# EAGLE board breakout1 (EAGLE 4.15)
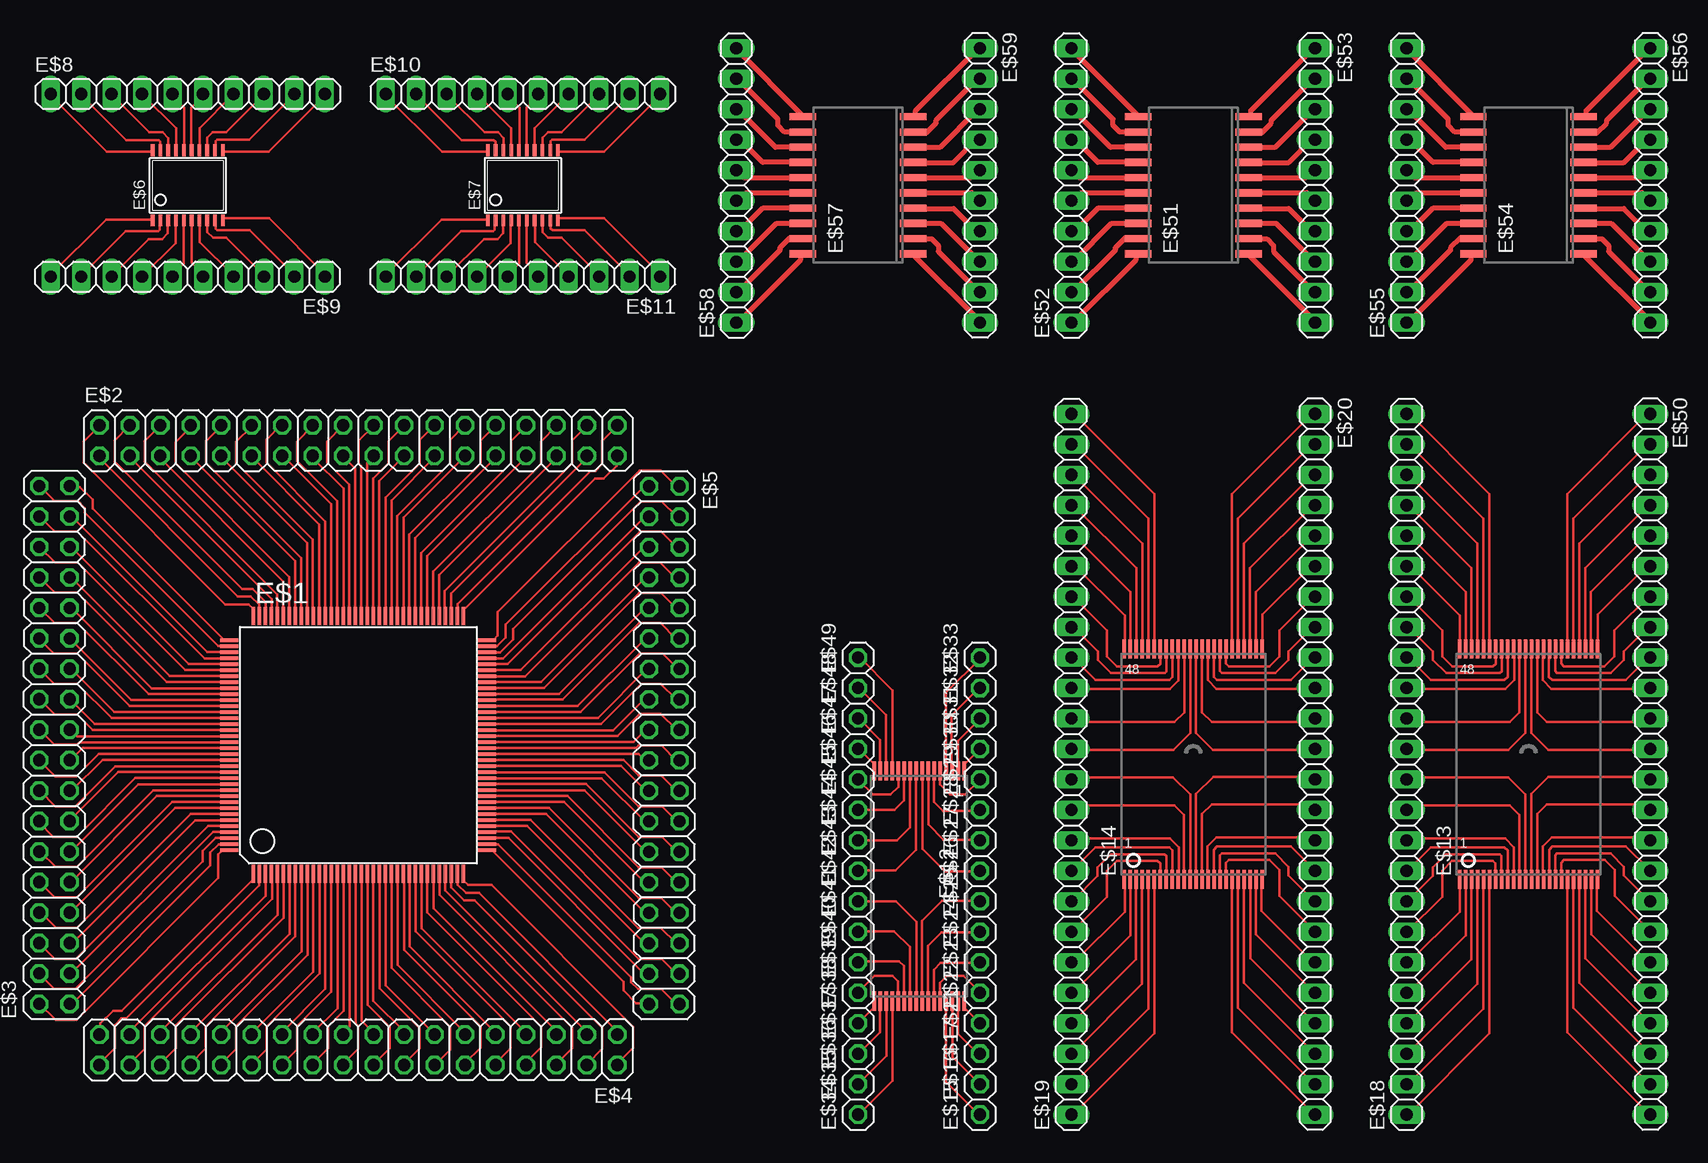
[diagram p0: board, top side]

No outline drawn. Coordinates in mm, seen from the top.
Copper layers (1*16): Top 0.035mm / dielectric 1.5mm / Bottom 0.035mm
Design rules "default": minimum track width 10mil, minimum drill 24mil, track to track 8mil, track to pad 8mil, pad to pad 8mil, via to via 8mil, smd to smd 8mil, copper to edge 40mil, drill to drill 8mil, minimum pad ring 10mil, minimum via ring 8mil, stop-mask expansion 4mil, vias tented up to drill 0mil, thermal gap 10mil

## Footprints (pad centres in the part's own frame; a part is rotated, then mirrored left to right if it is on the bottom)
TQFP144 = smd 0.27 x 1.5: 1 -8.75,-10.75; 2 -8.25,-10.75; 3 -7.75,-10.75; 4 -7.25,-10.75; 5 -6.75,-10.75; 6 -6.25,-10.75; 7 -5.75,-10.75; 8 -5.25,-10.75; 9 -4.75,-10.75; 10 -4.25,-10.75; 11 -3.75,-10.75; 12 -3.25,-10.75; 13 -2.75,-10.75; 14 -2.25,-10.75; 15 -1.75,-10.75; 16 -1.25,-10.75; 17 -0.75,-10.75; 18 -0.25,-10.75; 19 0.25,-10.75; 20 0.75,-10.75; 21 1.25,-10.75; 22 1.75,-10.75; 23 2.25,-10.75; 24 2.75,-10.75; 25 3.25,-10.75; 26 3.75,-10.75; 27 4.25,-10.75; 28 4.75,-10.75; 29 5.25,-10.75; 30 5.75,-10.75; 31 6.25,-10.75; 32 6.75,-10.75; 33 7.25,-10.75; 34 7.75,-10.75; 35 8.25,-10.75; 36 8.75,-10.75; 73 8.75,10.75; 74 8.25,10.75; 75 7.75,10.75; 76 7.25,10.75; 77 6.75,10.75; 78 6.25,10.75; 79 5.75,10.75; 80 5.25,10.75; 81 4.75,10.75; 82 4.25,10.75; 83 3.75,10.75; 84 3.25,10.75; 85 2.75,10.75; 86 2.25,10.75; 87 1.75,10.75; 88 1.25,10.75; 89 0.75,10.75; 90 0.25,10.75; 91 -0.25,10.75; 92 -0.75,10.75; 93 -1.25,10.75; 94 -1.75,10.75; 95 -2.25,10.75; 96 -2.75,10.75; 97 -3.25,10.75; 98 -3.75,10.75; 99 -4.25,10.75; 100 -4.75,10.75; 101 -5.25,10.75; 102 -5.75,10.75; 103 -6.25,10.75; 104 -6.75,10.75; 105 -7.25,10.75; 106 -7.75,10.75; 107 -8.25,10.75; 108 -8.75,10.75 | smd 1.5 x 0.27: 37 10.75,-8.75; 38 10.75,-8.25; 39 10.75,-7.75; 40 10.75,-7.25; 41 10.75,-6.75; 42 10.75,-6.25; 43 10.75,-5.75; 44 10.75,-5.25; 45 10.75,-4.75; 46 10.75,-4.25; 47 10.75,-3.75; 48 10.75,-3.25; 49 10.75,-2.75; 50 10.75,-2.25; 51 10.75,-1.75; 52 10.75,-1.25; 53 10.75,-0.75; 54 10.75,-0.25; 55 10.75,0.25; 56 10.75,0.75; 57 10.75,1.25; 58 10.75,1.75; 59 10.75,2.25; 60 10.75,2.75; 61 10.75,3.25; 62 10.75,3.75; 63 10.75,4.25; 64 10.75,4.75; 65 10.75,5.25; 66 10.75,5.75; 67 10.75,6.25; 68 10.75,6.75; 69 10.75,7.25; 70 10.75,7.75; 71 10.75,8.25; 72 10.75,8.75; 109 -10.75,8.75; 110 -10.75,8.25; 111 -10.75,7.75; 112 -10.75,7.25; 113 -10.75,6.75; 114 -10.75,6.25; 115 -10.75,5.75; 116 -10.75,5.25; 117 -10.75,4.75; 118 -10.75,4.25; 119 -10.75,3.75; 120 -10.75,3.25; 121 -10.75,2.75; 122 -10.75,2.25; 123 -10.75,1.75; 124 -10.75,1.25; 125 -10.75,0.75; 126 -10.75,0.25; 127 -10.75,-0.25; 128 -10.75,-0.75; 129 -10.75,-1.25; 130 -10.75,-1.75; 131 -10.75,-2.25; 132 -10.75,-2.75; 133 -10.75,-3.25; 134 -10.75,-3.75; 135 -10.75,-4.25; 136 -10.75,-4.75; 137 -10.75,-5.25; 138 -10.75,-5.75; 139 -10.75,-6.25; 140 -10.75,-6.75; 141 -10.75,-7.25; 142 -10.75,-7.75; 143 -10.75,-8.25; 144 -10.75,-8.75
2X18 = drill 1.016 octagon: 1 -21.59,-1.27; 2 -21.59,1.27; 3 -19.05,-1.27; 4 -19.05,1.27; 5 -16.51,-1.27; 6 -16.51,1.27; 7 -13.97,-1.27; 8 -13.97,1.27; 9 -11.43,-1.27; 10 -11.43,1.27; 11 -8.89,-1.27; 12 -8.89,1.27; 13 -6.35,-1.27; 14 -6.35,1.27; 15 -3.81,-1.27; 16 -3.81,1.27; 17 -1.27,-1.27; 18 -1.27,1.27; 19 1.27,-1.27; 20 1.27,1.27; 21 3.81,-1.27; 22 3.81,1.27; 23 6.35,-1.27; 24 6.35,1.27; 25 8.89,-1.27; 26 8.89,1.27; 27 11.43,-1.27; 28 11.43,1.27; 29 13.97,-1.27; 30 13.97,1.27; 31 16.51,-1.27; 32 16.51,1.27; 33 19.05,-1.27; 34 19.05,1.27; 35 21.59,-1.27; 36 21.59,1.27
TSSOP20 = smd 0.305 x 0.991: 1 -2.925,-2.918; 2 -2.275,-2.918; 3 -1.625,-2.918; 4 -0.975,-2.918; 5 -0.325,-2.918; 6 0.325,-2.918; 7 0.975,-2.918; 8 1.625,-2.918; 9 2.275,-2.918; 10 2.925,-2.918; 11 2.925,2.918; 12 2.275,2.918; 13 1.625,2.918; 14 0.975,2.918; 15 0.325,2.918; 16 -0.325,2.918; 17 -0.975,2.918; 18 -1.625,2.918; 19 -2.275,2.918; 20 -2.925,2.918
1X10 = drill 1.016 long: 1 -11.43,0; 2 -8.89,0; 3 -6.35,0; 4 -3.81,0; 5 -1.27,0; 6 1.27,0; 7 3.81,0; 8 6.35,0; 9 8.89,0; 10 11.43,0
TSOP32 = smd 0.3 x 1.6: 1 -3.75,-9.6; 2 -3.25,-9.6; 3 -2.75,-9.6; 4 -2.25,-9.6; 5 -1.75,-9.6; 6 -1.25,-9.6; 7 -0.75,-9.6; 8 -0.25,-9.6; 9 0.25,-9.6; 10 0.75,-9.6; 11 1.25,-9.6; 12 1.75,-9.6; 13 2.25,-9.6; 14 2.75,-9.6; 15 3.25,-9.6; 16 3.75,-9.6; 17 3.75,9.59; 18 3.25,9.59; 19 2.75,9.59; 20 2.25,9.59; 21 1.75,9.59; 22 1.25,9.59; 23 0.75,9.59; 24 0.25,9.59; 25 -0.25,9.59; 26 -0.75,9.59; 27 -1.25,9.59; 28 -1.75,9.59; 29 -2.25,9.59; 30 -2.75,9.59; 31 -3.25,9.59; 32 -3.75,9.59
TSOP48 = smd 0.3 x 1.6: 1 -5.75,-9.6; 2 -5.25,-9.6; 3 -4.75,-9.6; 4 -4.25,-9.6; 5 -3.75,-9.6; 6 -3.25,-9.6; 7 -2.75,-9.6; 8 -2.25,-9.6; 9 -1.75,-9.6; 10 -1.25,-9.6; 11 -0.75,-9.6; 12 -0.25,-9.6; 13 0.25,-9.6; 14 0.75,-9.6; 15 1.25,-9.6; 16 1.75,-9.6; 17 2.25,-9.6; 18 2.75,-9.6; 19 3.25,-9.6; 20 3.75,-9.6; 21 4.25,-9.6; 22 4.75,-9.6; 23 5.25,-9.6; 24 5.75,-9.6; 25 5.75,9.6; 26 5.25,9.6; 27 4.75,9.6; 28 4.25,9.6; 29 3.75,9.6; 30 3.25,9.6; 31 2.75,9.6; 32 2.25,9.6; 33 1.75,9.6; 34 1.25,9.6; 35 0.75,9.6; 36 0.25,9.6; 37 -0.25,9.6; 38 -0.75,9.6; 39 -1.25,9.6; 40 -1.75,9.6; 41 -2.25,9.6; 42 -2.75,9.6; 43 -3.25,9.6; 44 -3.75,9.6; 45 -4.25,9.6; 46 -4.75,9.6; 47 -5.25,9.6; 48 -5.75,9.6
1X01 = drill 1.016 octagon: 1 0,0
1X24 = drill 1.016 long: 1 -29.21,0; 2 -26.67,0; 3 -24.13,0; 4 -21.59,0; 5 -19.05,0; 6 -16.51,0; 7 -13.97,0; 8 -11.43,0; 9 -8.89,0; 10 -6.35,0; 11 -3.81,0; 12 -1.27,0; 13 1.27,0; 14 3.81,0; 15 6.35,0; 16 8.89,0; 17 11.43,0; 18 13.97,0; 19 16.51,0; 20 19.05,0; 21 21.59,0; 22 24.13,0; 23 26.67,0; 24 29.21,0
SO20 = smd 0.6 x 2.2: 1 -5.715,-4.6; 2 -4.445,-4.6; 3 -3.175,-4.6; 4 -1.905,-4.6; 5 -0.635,-4.6; 6 0.635,-4.6; 7 1.905,-4.6; 8 3.175,-4.6; 9 4.445,-4.6; 10 5.715,-4.6; 11 5.715,4.6; 12 4.445,4.6; 13 3.175,4.6; 14 1.905,4.6; 15 0.635,4.6; 16 -0.635,4.6; 17 -1.905,4.6; 18 -3.175,4.6; 19 -4.445,4.6; 20 -5.715,4.6

## Placement (x,y rotation side)
E$1  [TQFP144]  29.47,32.07 0 top
E$2  [2X18]  29.47,57.47 0 top
E$3  [2X18]  4.12,32.09 90 top
E$4  [2X18]  29.46,6.68 180 top
E$5  [2X18]  54.96,32.07 270 top
E$6  [TSSOP20]  15.24,78.74 0 top
E$7  [TSSOP20]  43.18,78.74 0 top
E$8  [1X10]  15.24,86.36 0 top
E$9  [1X10]  15.24,71.12 180 top
E$10  [1X10]  43.18,86.36 0 top
E$11  [1X10]  43.18,71.12 180 top
E$12  [TSOP32]  76.2,20.32 180 top
E$13  [TSOP48]  127,30.48 0 top
E$14  [TSOP48]  99.06,30.48 0 top
E$15  [1X01]  81.28,1.27 90 top
E$16  [1X01]  81.28,3.81 90 top
E$17  [1X01]  81.28,6.35 90 top
E$18  [1X24]  116.84,30.48 90 top
E$19  [1X24]  88.9,30.48 90 top
E$20  [1X24]  109.22,30.48 270 top
E$21  [1X01]  81.28,8.89 90 top
E$22  [1X01]  81.28,11.43 90 top
E$23  [1X01]  81.28,13.97 90 top
E$24  [1X01]  81.28,16.51 90 top
E$25  [1X01]  81.28,19.05 90 top
E$26  [1X01]  81.28,21.59 90 top
E$27  [1X01]  81.28,24.13 90 top
E$28  [1X01]  81.28,26.67 90 top
E$29  [1X01]  81.28,29.21 90 top
E$30  [1X01]  81.28,31.75 90 top
E$31  [1X01]  81.28,34.29 90 top
E$32  [1X01]  81.28,36.83 90 top
E$33  [1X01]  81.28,39.37 90 top
E$34  [1X01]  71.12,1.27 90 top
E$35  [1X01]  71.12,3.81 90 top
E$36  [1X01]  71.12,6.35 90 top
E$37  [1X01]  71.12,8.89 90 top
E$38  [1X01]  71.12,11.43 90 top
E$39  [1X01]  71.12,13.97 90 top
E$40  [1X01]  71.12,16.51 90 top
E$41  [1X01]  71.12,19.05 90 top
E$42  [1X01]  71.12,21.59 90 top
E$43  [1X01]  71.12,24.13 90 top
E$44  [1X01]  71.12,26.67 90 top
E$45  [1X01]  71.12,29.21 90 top
E$46  [1X01]  71.12,31.75 90 top
E$47  [1X01]  71.12,34.29 90 top
E$48  [1X01]  71.12,36.83 90 top
E$49  [1X01]  71.12,39.37 90 top
E$50  [1X24]  137.16,30.48 270 top
E$51  [SO20]  99.06,78.74 90 top
E$52  [1X10]  88.9,78.74 90 top
E$53  [1X10]  109.22,78.74 270 top
E$54  [SO20]  127,78.74 90 top
E$55  [1X10]  116.84,78.74 90 top
E$56  [1X10]  137.16,78.74 270 top
E$57  [SO20]  71.12,78.74 90 top
E$58  [1X10]  60.96,78.74 90 top
E$59  [1X10]  81.28,78.74 270 top

## Library data of the parts
E$1 E$6 E$7 = ref-packages
E$2-E$5 E$8-E$11 E$15-E$50 E$52 E$53 E$55 E$56 E$58 E$59 = pinhead
E$12 = atmel
E$13 E$14 = am29-memory
E$51 E$54 E$57 = st-microelectronics

## Tracks (layer width: path | path; a pad name or v marks a point on that pad's centre or on a via)
S$1
  Top 0.2: 23.72,43.28 23.72,46.1 14.22,55.6 14.22,57.33 15.56,58.66
S$2
  Top 0.2: 7.85,56.26 7.82,56.24
S$3
  Top 0.2: 23.2,43.38 23.2,45.73 12.94,55.99
S$4
  Top 0.2: 22.7,43.28 22.7,44.65 11.65,55.69 11.65,57.42 12.94,58.71
S$5
  Top 0.2: 22.23,43.31 22.23,44.25 10.47,56.02
S$6
  Top 0.2: 21.74,43.33 21.74,44 20.65,45.09 19.76,45.09 9.13,55.72 9.13,57.47 10.37,58.71
S$7
  Top 0.2: 21.2,43.28 21.2,43.78 20.5,44.47 19.42,44.47 7.77,56.12
S$8
  Top 0.2: 20.73,43.26 20.73,43.41 20.33,43.8 18.38,43.8 6.56,55.62 6.56,57.38 7.95,58.76
S$9
  Top 0.2: 24.21,43.28 24.21,47.41 15.46,56.16
S$10
  Top 0.2: 24.7,43.31 24.7,47.66 16.77,55.6 16.77,57.42 18.05,58.71
S$11
  Top 0.2: 25.2,42.99 25.2,48.92 18.01,56.12
S$12
  Top 0.2: 25.67,43.31 25.67,49.22 19.29,55.6 19.29,57.38 20.55,58.64
S$13
  Top 0.2: 26.19,43.31 26.19,50.48 20.55,56.12 20.55,56.09
S$14
  Top 0.2: 26.71,43.28 26.71,50.73 21.81,55.62 21.81,57.55 23.05,58.78
S$15
  Top 0.2: 27.2,43.21 27.2,52.16 23.12,56.24
S$16
  Top 0.2: 27.7,43.28 27.7,52.41 24.36,55.74 24.36,57.4 25.62,58.66
S$17
  Top 0.2: 28.24,43.33 28.24,53.45 25.62,56.06
S$18
  Top 0.2: 28.71,43.24 28.71,53.79 26.86,55.65 26.86,57.4 28.16,58.71
S$19
  Top 0.2: 29.2,43.24 29.2,55.13 28.19,56.14
S$20
  Top 0.2: 29.7,43.16 29.7,55.35 29.5,55.55 29.5,57.47 30.76,58.73 30.76,58.69
S$21
  Top 0.2: 30.19,43.36 30.19,55.57 30.76,56.14
S$22
  Top 0.2: 30.71,43.31 30.71,54.28 32,55.57 32,57.42 33.21,58.64
S$23
  Top 0.2: 31.2,43.33 31.2,54.09 33.26,56.14
S$24
  Top 0.2: 31.72,43.36 31.72,52.7 34.57,55.55 34.57,57.5 35.83,58.76
S$25
  Top 0.2: 32.22,43.33 32.22,52.48 35.9,56.16
S$26
  Top 0.2: 32.71,43.33 32.71,51.17 37.11,55.57 37.11,57.52 38.3,58.71
S$27
  Top 0.2: 33.23,43.38 33.23,51.05 38.27,56.09
S$28
  Top 0.2: 33.7,43.36 33.7,49.61 39.63,55.55 39.63,57.45 40.89,58.71
S$29
  Top 0.2: 34.2,43.31 34.2,49.34 40.89,56.04
S$30
  Top 0.2: 34.72,43.28 34.72,48.11 42.18,55.57 42.18,57.42 43.49,58.73
S$31
  Top 0.2: 35.21,43.31 35.21,47.86 43.41,56.06
S$32
  Top 0.2: 35.7,43.36 35.7,46.55 44.68,55.52 44.68,57.4 45.99,58.71 45.99,58.66
S$33
  Top 0.2: 36.2,43.31 36.2,46.28 46.01,56.09
S$34
  Top 0.2: 36.67,43.33 36.67,44.94 47.27,55.55 47.27,57.45 48.53,58.71
S$35
  Top 0.2: 37.21,43.41 37.21,44.72 48.51,56.02
S$36
  Top 0.2: 37.73,43.21 37.73,43.83 48.83,54.93 49.22,54.93 49.79,55.5 49.79,57.42 51.03,58.66 51.03,58.69
S$37
  Top 0.2: 38.2,43.31 49.17,54.28 49.92,54.28 50.98,55.35 50.98,56.04
S$38
  Top 0.2: 5.33,10.47 5.35,10.44
S$39
  Top 0.2: 18.31,26.83 14.18,26.83 5.43,18.08
S$40
  Top 0.2: 18.28,27.33 13.93,27.33 6,19.39 4.17,19.39 2.88,20.68
S$41
  Top 0.2: 18.6,27.82 12.67,27.82 5.48,20.63
S$42
  Top 0.2: 18.28,28.29 12.37,28.29 6,21.91 4.22,21.91 2.96,23.17
S$43
  Top 0.2: 18.28,28.81 11.11,28.81 5.48,23.17 5.5,23.17
S$44
  Top 0.2: 18.31,29.33 10.87,29.33 5.97,24.43 4.04,24.43 2.81,25.67
S$45
  Top 0.2: 18.38,29.82 9.43,29.82 5.35,25.74
S$46
  Top 0.2: 18.31,30.32 9.19,30.32 5.85,26.98 4.19,26.98 2.93,28.24
S$47
  Top 0.2: 18.26,30.86 8.15,30.86 5.53,28.24
S$48
  Top 0.2: 18.36,31.33 7.8,31.33 5.95,29.48 4.19,29.48 2.88,30.79
S$49
  Top 0.2: 18.36,31.82 6.47,31.82 5.45,30.81
S$50
  Top 0.2: 18.43,32.32 6.24,32.32 6.05,32.12 4.12,32.12 2.86,33.38 2.91,33.38
S$51
  Top 0.2: 18.23,32.81 6.02,32.81 5.45,33.38
S$52
  Top 0.2: 18.28,33.33 7.31,33.33 6.02,34.62 4.17,34.62 2.96,35.83
S$53
  Top 0.2: 18.26,33.83 7.5,33.83 5.45,35.88
S$54
  Top 0.2: 18.23,34.34 8.89,34.34 6.05,37.19 4.09,37.19 2.83,38.45
S$55
  Top 0.2: 18.26,34.84 9.11,34.84 5.43,38.52
S$56
  Top 0.2: 18.26,35.33 10.42,35.33 6.02,39.73 4.07,39.73 2.88,40.92
S$57
  Top 0.2: 18.21,35.85 10.54,35.85 5.5,40.9
S$58
  Top 0.2: 18.23,36.32 11.98,36.32 6.05,42.26 4.14,42.26 2.88,43.52
S$59
  Top 0.2: 18.28,36.82 12.25,36.82 5.55,43.52
S$60
  Top 0.2: 18.31,37.34 13.49,37.34 6.02,44.8 4.17,44.8 2.86,46.11
S$61
  Top 0.2: 18.28,37.83 13.73,37.83 5.53,46.04
S$62
  Top 0.2: 18.23,38.33 15.04,38.33 6.07,47.3 4.19,47.3 2.88,48.61 2.93,48.61
S$63
  Top 0.2: 18.28,38.82 15.31,38.82 5.5,48.63
S$64
  Top 0.2: 18.26,39.29 16.65,39.29 6.05,49.89 4.14,49.89 2.88,51.15
S$65
  Top 0.2: 18.18,39.83 16.87,39.83 5.58,51.13
S$66
  Top 0.2: 18.38,40.35 17.76,40.35 6.66,51.45 6.66,51.84 6.1,52.41 4.17,52.41 2.93,53.65 2.91,53.65
S$67
  Top 0.2: 18.28,40.82 7.31,51.8 7.31,52.54 6.24,53.6 5.55,53.6
S$68
  Top 0.2: 18.31,26.34 15.49,26.34 6,16.85 4.27,16.85 2.93,18.18
S$69
  Top 0.2: 18.21,25.82 15.86,25.82 5.6,15.56
S$70
  Top 0.2: 18.31,25.32 16.95,25.32 5.9,14.28 4.17,14.28 2.88,15.56
S$71
  Top 0.2: 18.28,24.85 17.34,24.85 5.58,13.09
S$72
  Top 0.2: 18.26,24.36 17.59,24.36 16.5,23.27 16.5,22.38 5.87,11.75 4.12,11.75 2.88,12.99
S$73
  Top 0.2: 18.31,23.82 17.81,23.82 17.12,23.12 17.12,22.04 5.48,10.39
S$74
  Top 0.2: 18.33,23.35 18.18,23.35 17.79,22.95 17.79,21 5.97,9.18 4.22,9.18 2.83,10.57
S$75
  Top 0.2: 51.08,7.96 51.11,7.98
S$76
  Top 0.2: 34.72,20.93 34.72,16.8 43.47,8.05
S$77
  Top 0.2: 34.23,20.91 34.23,16.56 42.16,8.62 42.16,6.79 40.87,5.51
S$78
  Top 0.2: 33.73,21.23 33.73,15.3 40.92,8.1
S$79
  Top 0.2: 33.26,20.91 33.26,15 39.64,8.62 39.64,6.84 38.38,5.58
S$80
  Top 0.2: 32.74,20.91 32.74,13.74 38.38,8.1 38.38,8.13
S$81
  Top 0.2: 32.22,20.93 32.22,13.49 37.12,8.6 37.12,6.67 35.88,5.43
S$82
  Top 0.2: 31.73,21.01 31.73,12.06 35.81,7.98
S$83
  Top 0.2: 31.23,20.93 31.23,11.81 34.57,8.47 34.57,6.82 33.31,5.56
S$84
  Top 0.2: 30.69,20.88 30.69,10.77 33.31,8.15
S$85
  Top 0.2: 30.22,20.98 30.22,10.43 32.07,8.57 32.07,6.82 30.76,5.51
S$86
  Top 0.2: 29.73,20.98 29.73,9.09 30.74,8.08
S$87
  Top 0.2: 29.23,21.06 29.23,8.87 29.43,8.67 29.43,6.74 28.17,5.48 28.17,5.53
S$88
  Top 0.2: 28.74,20.86 28.74,8.65 28.17,8.08
S$89
  Top 0.2: 28.22,20.91 28.22,9.93 26.93,8.65 26.93,6.79 25.72,5.58
S$90
  Top 0.2: 27.72,20.88 27.72,10.13 25.67,8.08
S$91
  Top 0.2: 27.2,20.86 27.2,11.51 24.36,8.67 24.36,6.72 23.1,5.46
S$92
  Top 0.2: 26.71,20.88 26.71,11.74 23.03,8.05
S$93
  Top 0.2: 26.22,20.88 26.22,13.05 21.82,8.65 21.82,6.69 20.63,5.51
S$94
  Top 0.2: 25.7,20.83 25.7,13.17 20.66,8.13
S$95
  Top 0.2: 25.23,20.86 25.23,14.6 19.3,8.67 19.3,6.77 18.04,5.51
S$96
  Top 0.2: 24.73,20.91 24.73,14.88 18.04,8.18
S$97
  Top 0.2: 24.21,20.93 24.21,16.11 16.75,8.65 16.75,6.79 15.44,5.48
S$98
  Top 0.2: 23.72,20.91 23.72,16.36 15.51,8.15
S$99
  Top 0.2: 23.23,20.86 23.23,17.67 14.25,8.7 14.25,6.82 12.94,5.51 12.94,5.56
S$100
  Top 0.2: 22.73,20.91 22.73,17.94 12.92,8.13
S$101
  Top 0.2: 22.26,20.88 22.26,19.27 11.66,8.67 11.66,6.77 10.4,5.51
S$102
  Top 0.2: 21.72,20.81 21.72,19.5 10.42,8.2
S$103
  Top 0.2: 21.2,21.01 21.2,20.39 10.1,9.29 9.71,9.29 9.14,8.72 9.14,6.79 7.9,5.56 7.9,5.53
S$104
  Top 0.2: 20.73,20.91 9.75,9.93 9.01,9.93 7.95,8.87 7.95,8.18
S$105
  Top 0.2: 35.21,20.93 35.21,18.11 44.7,8.62 44.7,6.89 43.37,5.56
S$106
  Top 0.2: 35.73,20.83 35.73,18.48 45.99,8.23
S$107
  Top 0.2: 36.23,20.93 36.23,19.57 47.27,8.52 47.27,6.79 45.99,5.51
S$108
  Top 0.2: 36.7,20.91 36.7,19.97 48.46,8.2
S$109
  Top 0.2: 37.19,20.88 37.19,20.22 38.28,19.13 39.17,19.13 49.8,8.5 49.8,6.74 48.56,5.51
S$110
  Top 0.2: 37.73,20.93 37.73,20.44 38.43,19.75 39.51,19.75 51.16,8.1
S$111
  Top 0.2: 38.2,20.96 38.2,20.81 38.6,20.41 40.55,20.41 52.37,8.6 52.37,6.84 50.98,5.46
S$112
  Top 0.2: 53.53,53.69 53.51,53.71
S$113
  Top 0.2: 40.55,37.32 44.68,37.32 53.43,46.07
S$114
  Top 0.2: 40.58,36.83 44.93,36.83 52.87,44.76 54.69,44.76 55.98,43.48
S$115
  Top 0.2: 40.26,36.34 46.19,36.34 53.38,43.53
S$116
  Top 0.2: 40.58,35.87 46.49,35.87 52.87,42.24 54.65,42.24 55.91,40.98
S$117
  Top 0.2: 40.58,35.35 47.75,35.35 53.38,40.98 53.36,40.98
S$118
  Top 0.2: 40.55,34.83 47.99,34.83 52.89,39.72 54.82,39.72 56.05,38.49
S$119
  Top 0.2: 40.48,34.33 49.43,34.33 53.51,38.41
S$120
  Top 0.2: 40.55,33.84 49.68,33.84 53.01,37.18 54.67,37.18 55.93,35.91
S$121
  Top 0.2: 40.6,33.3 50.71,33.3 53.33,35.91
S$122
  Top 0.2: 40.51,32.83 51.06,32.83 52.91,34.68 54.67,34.68 55.98,33.37
S$123
  Top 0.2: 40.51,32.33 52.4,32.33 53.41,33.34
S$124
  Top 0.2: 40.43,31.84 52.62,31.84 52.81,32.03 54.74,32.03 56,30.77 55.95,30.77
S$125
  Top 0.2: 40.63,31.34 52.84,31.34 53.41,30.77
S$126
  Top 0.2: 40.58,30.82 51.55,30.82 52.84,29.54 54.69,29.54 55.91,28.33
S$127
  Top 0.2: 40.6,30.33 51.36,30.33 53.41,28.28
S$128
  Top 0.2: 40.63,29.81 49.97,29.81 52.81,26.97 54.77,26.97 56.03,25.71
S$129
  Top 0.2: 40.6,29.32 49.75,29.32 53.43,25.63
S$130
  Top 0.2: 40.6,28.82 48.44,28.82 52.84,24.42 54.79,24.42 55.98,23.23
S$131
  Top 0.2: 40.65,28.3 48.32,28.3 53.36,23.26
S$132
  Top 0.2: 40.63,27.83 46.88,27.83 52.81,21.9 54.72,21.9 55.98,20.64
S$133
  Top 0.2: 40.58,27.34 46.61,27.34 53.31,20.64
S$134
  Top 0.2: 40.55,26.82 45.38,26.82 52.84,19.36 54.69,19.36 56,18.05
S$135
  Top 0.2: 40.58,26.32 45.13,26.32 53.33,18.12
S$136
  Top 0.2: 40.63,25.83 43.82,25.83 52.79,16.86 54.67,16.86 55.98,15.55 55.93,15.55
S$137
  Top 0.2: 40.58,25.34 43.55,25.34 53.36,15.52
S$138
  Top 0.2: 40.6,24.87 42.21,24.87 52.81,14.26 54.72,14.26 55.98,13
S$139
  Top 0.2: 40.68,24.32 41.99,24.32 53.28,13.03
S$140
  Top 0.2: 40.48,23.8 41.1,23.8 52.2,12.71 52.2,12.31 52.77,11.74 54.69,11.74 55.93,10.51 55.95,10.51
S$141
  Top 0.2: 40.58,23.33 51.55,12.36 51.55,11.62 52.62,10.55 53.31,10.55
S$142
  Top 0.2: 40.55,37.82 43.37,37.82 52.87,47.31 54.59,47.31 55.93,45.98
S$143
  Top 0.2: 40.65,38.34 43,38.34 53.26,48.59
S$144
  Top 0.2: 40.55,38.83 41.91,38.83 52.96,49.88 54.69,49.88 55.98,48.59
S$145
  Top 0.2: 40.58,39.3 41.52,39.3 53.28,51.07
S$146
  Top 0.2: 40.6,39.8 41.27,39.8 42.36,40.88 42.36,41.77 52.99,52.4 54.74,52.4 55.98,51.16
S$147
  Top 0.2: 40.55,40.34 41.05,40.34 41.74,41.03 41.74,42.12 53.38,53.76
S$148
  Top 0.2: 40.53,40.81 40.68,40.81 41.07,41.2 41.07,43.16 52.89,54.97 54.65,54.97 56.03,53.59
S$149
  Top 0.2: 12.35,81.53 8.5,81.53 3.72,86.31
S$150
  Top 0.2: 12.94,81.57 12.94,82.38 12.81,82.51 10.12,82.51 6.41,86.23
S$151
  Top 0.2: 13.63,81.7 13.63,82.68 13.16,83.15 12.04,83.15 8.93,86.27
S$152
  Top 0.2: 14.27,81.7 14.27,83.49 11.53,86.23
S$153
  Top 0.2: 14.95,81.7 14.95,85.2 13.93,86.23
S$154
  Top 0.2: 18.16,75.99 22.01,75.99 26.79,71.2
S$155
  Top 0.2: 17.57,75.94 17.57,75.13 17.69,75 20.39,75 24.1,71.29
S$156
  Top 0.2: 16.88,75.82 16.88,74.83 17.35,74.36 18.46,74.36 21.58,71.25
S$157
  Top 0.2: 16.24,75.82 16.24,74.02 18.98,71.29
S$158
  Top 0.2: 15.56,75.82 15.56,72.31 16.58,71.29
S$159
  Top 0.2: 12.3,75.89 8.46,75.89 3.67,71.11
S$160
  Top 0.2: 12.9,75.85 12.9,75.04 12.77,74.91 10.08,74.91 6.36,71.2
S$161
  Top 0.2: 13.58,75.72 13.58,74.74 13.11,74.27 12,74.27 8.88,71.15
S$162
  Top 0.2: 14.22,75.72 14.22,73.93 11.49,71.2
S$163
  Top 0.2: 14.91,75.72 14.91,72.22 13.88,71.2
S$164
  Top 0.2: 18.15,81.55 22,81.55 26.78,86.34
S$165
  Top 0.2: 17.55,81.6 17.55,82.41 17.68,82.54 20.37,82.54 24.09,86.25
S$166
  Top 0.2: 16.87,81.72 16.87,82.71 17.34,83.18 18.45,83.18 21.57,86.29
S$167
  Top 0.2: 16.23,81.72 16.23,83.52 18.96,86.25
S$168
  Top 0.2: 15.54,81.72 15.54,85.23 16.57,86.25
S$169
  Top 0.2: 40.28,81.53 36.44,81.53 31.66,86.31
S$170
  Top 0.2: 40.88,81.57 40.88,82.38 40.76,82.51 38.06,82.51 34.35,86.23
S$171
  Top 0.2: 41.57,81.7 41.57,82.68 41.1,83.15 39.98,83.15 36.87,86.27
S$172
  Top 0.2: 42.21,81.7 42.21,83.49 39.47,86.23
S$173
  Top 0.2: 42.89,81.7 42.89,85.2 41.87,86.23
S$174
  Top 0.2: 46.1,75.99 49.95,75.99 54.73,71.2
S$175
  Top 0.2: 45.51,75.94 45.51,75.13 45.63,75 48.33,75 52.04,71.29
S$176
  Top 0.2: 44.82,75.82 44.82,74.83 45.29,74.36 46.4,74.36 49.52,71.25
S$177
  Top 0.2: 44.18,75.82 44.18,74.02 46.91,71.29
S$178
  Top 0.2: 43.5,75.82 43.5,72.31 44.52,71.29
S$179
  Top 0.2: 40.24,75.89 36.4,75.89 31.61,71.11
S$180
  Top 0.2: 40.84,75.85 40.84,75.04 40.71,74.91 38.02,74.91 34.3,71.2
S$181
  Top 0.2: 41.52,75.72 41.52,74.74 41.05,74.27 39.94,74.27 36.82,71.15
S$182
  Top 0.2: 42.16,75.72 42.16,73.93 39.43,71.2
S$183
  Top 0.2: 42.85,75.72 42.85,72.22 41.82,71.2
S$184
  Top 0.2: 46.09,81.55 49.94,81.55 54.72,86.34
S$185
  Top 0.2: 45.49,81.6 45.49,82.41 45.62,82.54 48.31,82.54 52.03,86.25
S$186
  Top 0.2: 44.81,81.72 44.81,82.71 45.28,83.18 46.39,83.18 49.51,86.29
S$187
  Top 0.2: 44.17,81.72 44.17,83.52 46.9,86.25
S$188
  Top 0.2: 43.48,81.72 43.48,85.23 44.51,86.25
S$189
  Top 0.2: 75.98,10.82 75.98,17.35 74.27,19.05 71.23,19.05
S$190
  Top 0.2: 75.43,10.95 75.43,15.25 74.12,16.56 71.13,16.56 71.03,16.46
S$191
  Top 0.2: 74.94,11.04 74.94,13.66 74.54,14.06 71.28,14.06 71.23,14.01
S$192
  Top 0.2: 74.44,10.97 74.44,12.38 73.98,12.85 72.49,12.85 71.11,11.46
S$193
  Top 0.2: 72.44,10.77 72.44,10.21 71.23,8.99
S$194
  Top 0.2: 72.96,10.7 72.96,8.13 71.21,6.37
S$195
  Top 0.2: 73.48,10.72 73.48,6.18 71.16,3.85 71.21,3.85
S$196
  Top 0.2: 73.98,10.7 73.98,4.08 71.16,1.26
S$197
  Top 0.2: 76.45,10.72 76.45,17.42 78.1,19.08 81.17,19.08 81.27,19.18
S$198
  Top 0.2: 76.94,10.9 76.94,15.32 78.08,16.46 81.05,16.46 81.22,16.63
S$199
  Top 0.2: 77.44,11.09 77.44,13.34 78,13.91 81.24,13.91 81.29,13.96
S$200
  Top 0.2: 77.96,10.9 77.96,12.26 78.52,12.82 79.91,12.82 81.34,11.39
S$201
  Top 0.2: 79.98,10.65 79.98,10.15 81.27,8.87
S$202
  Top 0.2: 79.44,10.65 79.44,8.01 81.14,6.3 81.14,6.27
S$203
  Top 0.2: 78.97,10.7 78.97,6.1 81.32,3.75
S$204
  Top 0.2: 78.45,10.8 78.45,4 81.29,1.16
S$205
  Top 0.2: 71.16,21.65 74.25,21.65 75.95,23.35 75.95,30.13
S$206
  Top 0.2: 71.13,24.12 74.35,24.12 75.43,25.21 75.43,30.18 75.46,30.2
S$207
  Top 0.2: 71.13,26.67 74.15,26.67 74.94,27.46 74.94,29.86 74.99,29.9
S$208
  Top 0.2: 74.47,29.93 74.47,28.59 73.83,27.95 72.34,27.95 71.08,29.21
S$209
  Top 0.2: 73.98,29.9 73.98,36.65 71.18,39.45
S$210
  Top 0.2: 73.46,30.18 73.46,34.58 71.18,36.85
S$211
  Top 0.2: 72.94,29.93 72.94,32.52 71.18,34.28
S$212
  Top 0.2: 72.49,30.2 72.49,30.45 71.16,31.78
S$213
  Top 0.2: 76.47,29.9 76.47,23.43 78.35,21.55 81.12,21.55 81.17,21.6 81.14,21.6
S$214
  Top 0.2: 76.97,29.93 76.97,25.45 78.25,24.17 81.22,24.17 81.24,24.14
S$215
  Top 0.2: 77.44,29.93 77.44,27.33 78.18,26.59 81.17,26.59 81.22,26.64
S$216
  Top 0.2: 77.96,29.9 77.96,28.79 78.8,27.95 80.03,27.95 81.22,29.14
S$217
  Top 0.2: 79.93,30.05 79.93,30.42 81.34,31.83
S$218
  Top 0.2: 79.46,30.15 79.46,32.42 81.29,34.25
S$219
  Top 0.2: 78.92,30.03 78.92,34.55 81.24,36.87
S$220
  Top 0.2: 78.45,30.27 78.45,36.45 81.34,39.35
S$221
  Top 0.2: 126.74,21.1 126.74,27.95 125.32,29.38 117.07,29.38 116.89,29.2
S$222
  Top 0.2: 126.24,21.4 126.24,26.26 125.44,27.06 117.28,27.06 116.84,26.62
S$223
  Top 0.2: 125.79,21.31 125.79,23.56 125.05,24.3 116.98,24.3 116.89,24.21
S$224
  Top 0.2: 125.26,21.28 125.26,23.29 124.99,23.56 118.85,23.56 116.92,21.63
S$225
  Top 0.2: 124.75,20.89 124.75,22.82 124.61,22.97 120.13,22.97 119.03,21.87 119.03,21.16 116.95,19.08
S$226
  Top 0.2: 124.25,20.74 124.25,22.2 124.01,22.43 120.63,22.43 119.8,21.6 119.8,19.44 116.84,16.47
S$227
  Top 0.2: 121.28,20.86 121.28,18.19 117.04,13.95
S$228
  Top 0.2: 121.76,20.77 121.76,16.23 116.92,11.4
S$229
  Top 0.2: 122.23,20.8 122.23,14.22 116.92,8.91
S$230
  Top 0.2: 122.74,20.86 122.74,12.17 116.86,6.3
S$231
  Top 0.2: 123.24,20.83 123.24,10.1 116.86,3.72
S$232
  Top 0.2: 123.75,20.77 123.75,8.05 116.92,1.23
S$233
  Top 0.2: 127.23,39.96 127.23,33.11 128.65,31.69 136.9,31.69 137.08,31.86
S$234
  Top 0.2: 127.73,39.66 127.73,34.8 128.53,34 136.69,34 137.14,34.45
S$235
  Top 0.2: 128.18,39.75 128.18,37.5 128.92,36.76 136.99,36.76 137.08,36.85
S$236
  Top 0.2: 128.71,39.78 128.71,37.77 128.98,37.5 135.12,37.5 137.05,39.43
S$237
  Top 0.2: 129.22,40.17 129.22,38.24 129.37,38.09 133.84,38.09 134.94,39.19 134.94,39.9 137.02,41.98
S$238
  Top 0.2: 129.72,40.32 129.72,38.86 129.96,38.63 133.34,38.63 134.17,39.46 134.17,41.62 137.14,44.59
S$239
  Top 0.2: 132.76,40.27 132.76,42.95 136.93,47.11
S$240
  Top 0.2: 132.21,40.29 132.21,44.83 137.05,49.66
S$241
  Top 0.2: 131.74,40.26 131.74,46.84 137.05,52.15
S$242
  Top 0.2: 131.23,40.2 131.23,48.89 137.11,54.76
S$243
  Top 0.2: 130.73,40.23 130.73,50.97 137.11,57.34
S$244
  Top 0.2: 130.23,40.29 130.23,53.01 137.05,59.83
S$245
  Top 0.2: 127.23,21.17 127.23,28.02 128.66,29.44 136.9,29.44 137.08,29.26
S$246
  Top 0.2: 127.74,21.46 127.74,26.33 128.54,27.13 136.69,27.13 137.14,26.68
S$247
  Top 0.2: 128.18,21.37 128.18,23.63 128.93,24.37 136.99,24.37 137.08,24.28
S$248
  Top 0.2: 128.72,21.34 128.72,23.36 128.98,23.63 135.12,23.63 137.05,21.7
S$249
  Top 0.2: 129.22,20.96 129.22,22.89 129.37,23.03 133.85,23.03 134.95,21.94 134.95,21.23 137.02,19.15
S$250
  Top 0.2: 129.73,20.81 129.73,22.26 129.96,22.5 133.34,22.5 134.17,21.67 134.17,19.5 137.14,16.54
S$251
  Top 0.2: 132.69,20.93 132.69,18.26 136.93,14.02
S$252
  Top 0.2: 132.22,20.84 132.22,16.3 137.05,11.47
S$253
  Top 0.2: 131.74,20.87 131.74,14.28 137.05,8.98
S$254
  Top 0.2: 131.24,20.93 131.24,12.24 137.11,6.37
S$255
  Top 0.2: 130.73,20.9 130.73,10.16 137.11,3.79
S$256
  Top 0.2: 130.23,20.84 130.23,8.12 137.05,1.29
S$257
  Top 0.2: 126.75,39.95 126.75,33.1 125.33,31.68 117.08,31.68 116.9,31.86
S$258
  Top 0.2: 126.25,39.66 126.25,34.79 125.45,33.99 117.29,33.99 116.84,34.44
S$259
  Top 0.2: 125.8,39.75 125.8,37.49 125.06,36.75 116.99,36.75 116.9,36.84
S$260
  Top 0.2: 125.27,39.78 125.27,37.76 125,37.49 118.86,37.49 116.93,39.42
S$261
  Top 0.2: 124.76,40.16 124.76,38.23 124.61,38.09 120.14,38.09 119.04,39.18 119.04,39.9 116.96,41.97
S$262
  Top 0.2: 124.26,40.31 124.26,38.86 124.02,38.62 120.64,38.62 119.81,39.45 119.81,41.62 116.84,44.58
S$263
  Top 0.2: 121.29,40.19 121.29,42.86 117.05,47.1
S$264
  Top 0.2: 121.77,40.28 121.77,44.82 116.93,49.65
S$265
  Top 0.2: 122.24,40.25 122.24,46.84 116.93,52.15
S$266
  Top 0.2: 122.75,40.19 122.75,48.88 116.87,54.76
S$267
  Top 0.2: 123.25,40.22 123.25,50.96 116.87,57.34
S$268
  Top 0.2: 123.75,40.28 123.75,53.01 116.93,59.83
S$269
  Top 0.2: 98.8,21.1 98.8,27.95 97.38,29.38 89.13,29.38 88.95,29.2
S$270
  Top 0.2: 98.3,21.4 98.3,26.26 97.5,27.06 89.34,27.06 88.9,26.62
S$271
  Top 0.2: 97.85,21.31 97.85,23.56 97.11,24.3 89.04,24.3 88.95,24.21
S$272
  Top 0.2: 97.32,21.28 97.32,23.29 97.05,23.56 90.91,23.56 88.98,21.63
S$273
  Top 0.2: 96.81,20.89 96.81,22.82 96.67,22.97 92.19,22.97 91.09,21.87 91.09,21.16 89.01,19.08
S$274
  Top 0.2: 96.31,20.74 96.31,22.2 96.07,22.43 92.69,22.43 91.86,21.6 91.86,19.44 88.9,16.47
S$275
  Top 0.2: 93.34,20.86 93.34,18.19 89.1,13.95
S$276
  Top 0.2: 93.82,20.77 93.82,16.23 88.98,11.4
S$277
  Top 0.2: 94.29,20.8 94.29,14.22 88.98,8.91
S$278
  Top 0.2: 94.8,20.86 94.8,12.17 88.92,6.3
S$279
  Top 0.2: 95.3,20.83 95.3,10.1 88.92,3.72
S$280
  Top 0.2: 95.81,20.77 95.81,8.05 88.98,1.23
S$281
  Top 0.2: 99.29,39.96 99.29,33.11 100.71,31.69 108.96,31.69 109.14,31.86
S$282
  Top 0.2: 99.79,39.66 99.79,34.8 100.59,34 108.75,34 109.2,34.45
S$283
  Top 0.2: 100.28,39.74 100.28,37.49 100.98,36.76 109.05,36.76 109.14,36.85
S$284
  Top 0.2: 100.77,39.78 100.77,37.77 101.04,37.5 107.18,37.5 109.11,39.43
S$285
  Top 0.2: 101.28,40.17 101.28,38.24 101.43,38.09 105.9,38.09 107,39.19 107,39.9 109.08,41.98
S$286
  Top 0.2: 101.78,40.32 101.78,38.86 102.02,38.63 105.4,38.63 106.23,39.46 106.23,41.62 109.2,44.59
S$287
  Top 0.2: 104.82,40.27 104.82,42.95 108.99,47.11
S$288
  Top 0.2: 104.27,40.29 104.27,44.83 109.11,49.66
S$289
  Top 0.2: 103.8,40.26 103.8,46.84 109.11,52.15
S$290
  Top 0.2: 103.29,40.2 103.29,48.89 109.17,54.76
S$291
  Top 0.2: 102.79,40.23 102.79,50.97 109.17,57.34
S$292
  Top 0.2: 102.29,40.29 102.29,53.01 109.11,59.83
S$293
  Top 0.2: 99.29,21.17 99.29,28.02 100.72,29.44 108.96,29.44 109.14,29.26
S$294
  Top 0.2: 99.8,21.46 99.8,26.33 100.6,27.13 108.75,27.13 109.2,26.68
S$295
  Top 0.2: 100.24,21.37 100.24,23.63 100.98,24.37 109.05,24.37 109.14,24.28
S$296
  Top 0.2: 100.78,21.34 100.78,23.36 101.04,23.63 107.18,23.63 109.11,21.7
S$297
  Top 0.2: 101.28,20.96 101.28,22.89 101.43,23.03 105.91,23.03 107,21.94 107,21.23 109.08,19.15
S$298
  Top 0.2: 101.78,20.81 101.78,22.26 102.02,22.5 105.4,22.5 106.23,21.67 106.23,19.5 109.2,16.54
S$299
  Top 0.2: 104.75,20.93 104.75,18.26 108.99,14.02
S$300
  Top 0.2: 104.28,20.84 104.28,16.3 109.11,11.47
S$301
  Top 0.2: 103.8,20.87 103.8,14.28 109.11,8.98
S$302
  Top 0.2: 103.3,20.93 103.3,12.24 109.17,6.37
S$303
  Top 0.2: 102.79,20.9 102.79,10.16 109.17,3.79
S$304
  Top 0.2: 102.29,20.84 102.29,8.12 109.11,1.29
S$305
  Top 0.2: 98.81,39.95 98.81,33.1 97.39,31.68 89.14,31.68 88.96,31.86
S$306
  Top 0.2: 98.31,39.66 98.31,34.79 97.51,33.99 89.35,33.99 88.9,34.44
S$307
  Top 0.2: 97.81,39.73 97.81,37.46 97.12,36.75 89.05,36.75 88.96,36.84
S$308
  Top 0.2: 97.33,39.78 97.33,37.76 97.06,37.49 90.92,37.49 88.99,39.42
S$309
  Top 0.2: 96.82,40.16 96.82,38.23 96.67,38.09 92.2,38.09 91.1,39.18 91.1,39.9 89.02,41.97
S$310
  Top 0.2: 96.32,40.31 96.32,38.86 96.08,38.62 92.7,38.62 91.87,39.45 91.87,41.62 88.9,44.58
S$311
  Top 0.2: 93.35,40.19 93.35,42.86 89.11,47.1
S$312
  Top 0.2: 93.83,40.28 93.83,44.82 88.99,49.65
S$313
  Top 0.2: 94.3,40.25 94.3,46.84 88.99,52.15
S$314
  Top 0.2: 94.81,40.19 94.81,48.88 88.93,54.76
S$315
  Top 0.2: 95.31,40.22 95.31,50.96 88.93,57.34
S$316
  Top 0.2: 95.81,40.28 95.81,53.01 88.99,59.83
S$317
  Top 0.4: 94.26,73.03 94.26,72.51 89,67.26
S$318
  Top 0.4: 94.3,74.35 93.36,74.35 92.55,73.54 92.55,73.33 89.09,69.86
S$319
  Top 0.4: 94.26,75.55 92.21,75.55 89.13,72.47
S$320
  Top 0.4: 94.3,76.83 91.1,76.83 89.13,74.86
S$321
  Top 0.4: 94.22,78.11 89.73,78.11 88.96,77.34
S$322
  Top 0.4: 94.34,79.35 89.6,79.35 88.92,80.03
S$323
  Top 0.4: 94.05,80.67 91.1,80.67 89.13,82.64
S$324
  Top 0.4: 94.26,81.91 92.17,81.91 88.96,85.11
S$325
  Top 0.4: 94.26,83.19 92.93,83.19 92.38,83.75 92.38,84.26 88.92,87.72
S$326
  Top 0.4: 94.43,84.52 94.43,84.56 88.92,90.07
S$327
  Top 0.4: 103.86,84.45 103.86,84.97 109.11,90.22
S$328
  Top 0.4: 103.82,83.13 104.76,83.13 105.57,83.94 105.57,84.16 109.03,87.61
S$329
  Top 0.4: 103.86,81.93 105.91,81.93 108.99,85.01
S$330
  Top 0.4: 103.82,80.65 107.02,80.65 108.99,82.62
S$331
  Top 0.4: 103.9,79.37 108.39,79.37 109.16,80.14
S$332
  Top 0.4: 103.78,78.13 108.52,78.13 109.2,77.45
S$333
  Top 0.4: 104.08,76.81 107.02,76.81 108.99,74.84
S$334
  Top 0.4: 103.86,75.57 105.95,75.57 109.16,72.36
S$335
  Top 0.4: 103.86,74.29 105.19,74.29 105.74,73.73 105.74,73.22 109.2,69.76
S$336
  Top 0.4: 103.69,72.96 103.69,72.92 109.2,67.41
S$337
  Top 0.4: 122.2,73.03 122.2,72.51 116.94,67.26
S$338
  Top 0.4: 122.24,74.35 121.3,74.35 120.49,73.54 120.49,73.33 117.03,69.86
S$339
  Top 0.4: 122.2,75.55 120.15,75.55 117.07,72.47
S$340
  Top 0.4: 122.24,76.83 119.04,76.83 117.07,74.86
S$341
  Top 0.4: 122.16,78.11 117.67,78.11 116.9,77.34
S$342
  Top 0.4: 122.28,79.35 117.54,79.35 116.86,80.03
S$343
  Top 0.4: 121.98,80.67 119.04,80.67 117.07,82.64
S$344
  Top 0.4: 122.2,81.91 120.11,81.91 116.9,85.11
S$345
  Top 0.4: 122.2,83.19 120.87,83.19 120.32,83.75 120.32,84.26 116.86,87.72
S$346
  Top 0.4: 122.37,84.52 122.37,84.56 116.86,90.07
S$347
  Top 0.4: 131.8,84.45 131.8,84.97 137.06,90.22
S$348
  Top 0.4: 131.76,83.13 132.7,83.13 133.51,83.94 133.51,84.16 136.97,87.61
S$349
  Top 0.4: 131.8,81.93 133.85,81.93 136.93,85.01
S$350
  Top 0.4: 131.76,80.65 134.96,80.65 136.93,82.62
S$351
  Top 0.4: 131.84,79.37 136.33,79.37 137.1,80.14
S$352
  Top 0.4: 131.72,78.13 136.46,78.13 137.14,77.45
S$353
  Top 0.4: 132.01,76.81 134.96,76.81 136.93,74.84
S$354
  Top 0.4: 131.8,75.57 133.89,75.57 137.1,72.36
S$355
  Top 0.4: 131.8,74.29 133.13,74.29 133.68,73.73 133.68,73.22 137.14,69.76
S$356
  Top 0.4: 131.63,72.96 131.63,72.92 137.14,67.41
S$357
  Top 0.4: 66.32,73.03 66.32,72.51 61.06,67.26
S$358
  Top 0.4: 66.36,74.35 65.42,74.35 64.61,73.54 64.61,73.33 61.15,69.86
S$359
  Top 0.4: 66.32,75.55 64.27,75.55 61.19,72.47
S$360
  Top 0.4: 66.36,76.83 63.16,76.83 61.19,74.86
S$361
  Top 0.4: 66.28,78.11 61.79,78.11 61.02,77.34
S$362
  Top 0.4: 66.4,79.35 61.66,79.35 60.98,80.03
S$363
  Top 0.4: 66.11,80.67 63.16,80.67 61.19,82.64
S$364
  Top 0.4: 66.32,81.91 64.23,81.91 61.02,85.11
S$365
  Top 0.4: 66.32,83.19 64.99,83.19 64.44,83.75 64.44,84.26 60.98,87.72
S$366
  Top 0.4: 66.49,84.52 66.49,84.56 60.98,90.07
S$367
  Top 0.4: 75.92,84.45 75.92,84.97 81.17,90.22
S$368
  Top 0.4: 75.88,83.13 76.82,83.13 77.63,83.94 77.63,84.16 81.09,87.61
S$369
  Top 0.4: 75.92,81.93 77.97,81.93 81.05,85.01
S$370
  Top 0.4: 75.88,80.65 79.08,80.65 81.05,82.62
S$371
  Top 0.4: 75.96,79.37 80.45,79.37 81.22,80.14
S$372
  Top 0.4: 75.84,78.13 80.58,78.13 81.26,77.45
S$373
  Top 0.4: 76.14,76.81 79.08,76.81 81.05,74.84
S$374
  Top 0.4: 75.92,75.57 78.01,75.57 81.22,72.36
S$375
  Top 0.4: 75.92,74.29 77.25,74.29 77.8,73.73 77.8,73.22 81.26,69.76
S$376
  Top 0.4: 75.75,72.96 75.75,72.92 81.26,67.41